# Altium PCB Breakout.PcbDoc
Units mm, origin at the board's own origin, x right, y up, seen from the top; angles counter-clockwise.
Board outline 22.86 x 22.73 mm, 2 copper layers (Top Layer, Bottom Layer), stack 1.591 mm thick; 14 components, 48 nets, 126 pads, 19 vias.
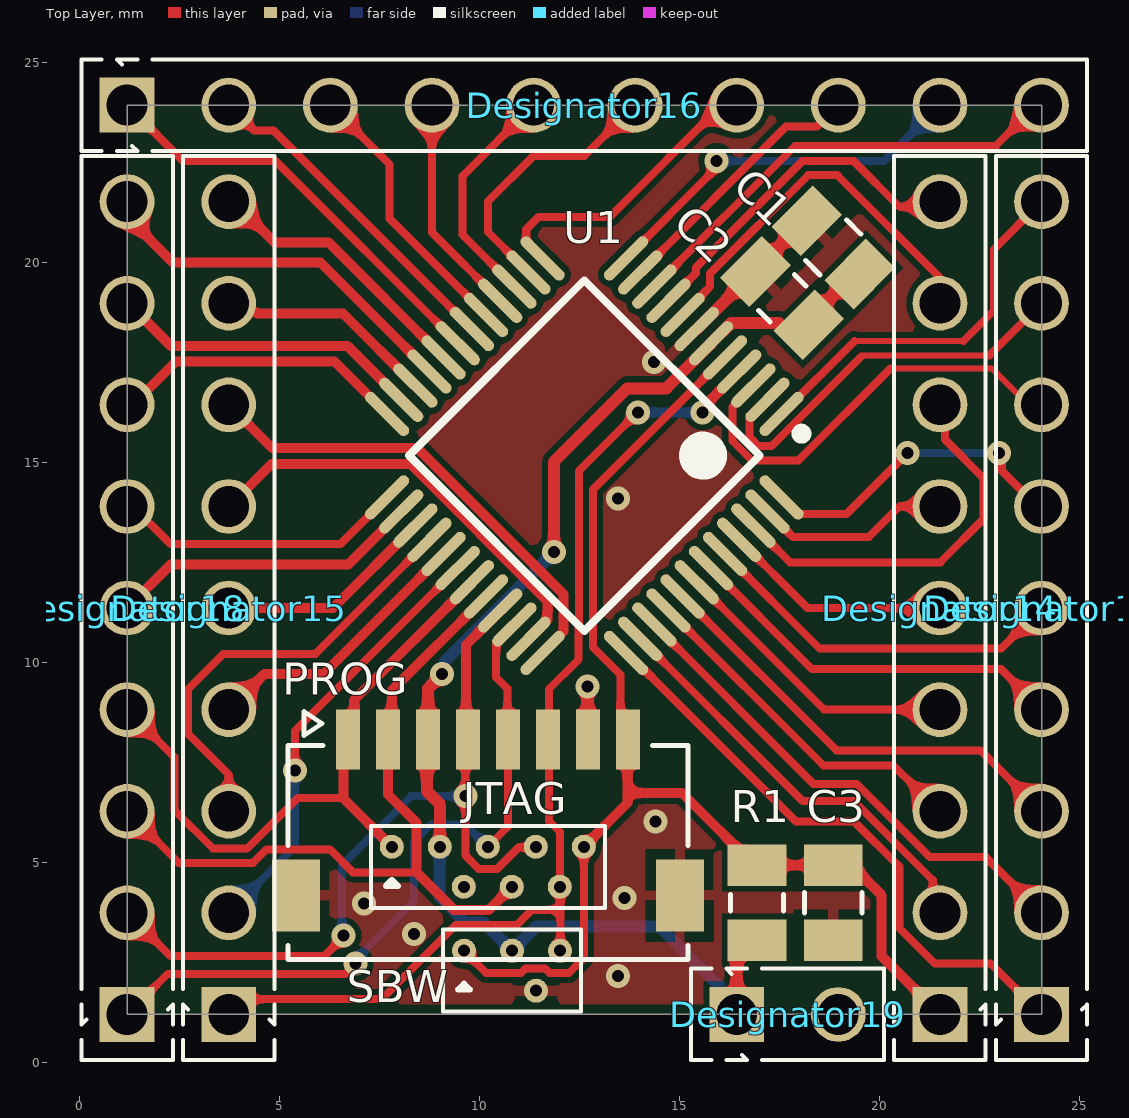
[diagram p0: Top Layer view]
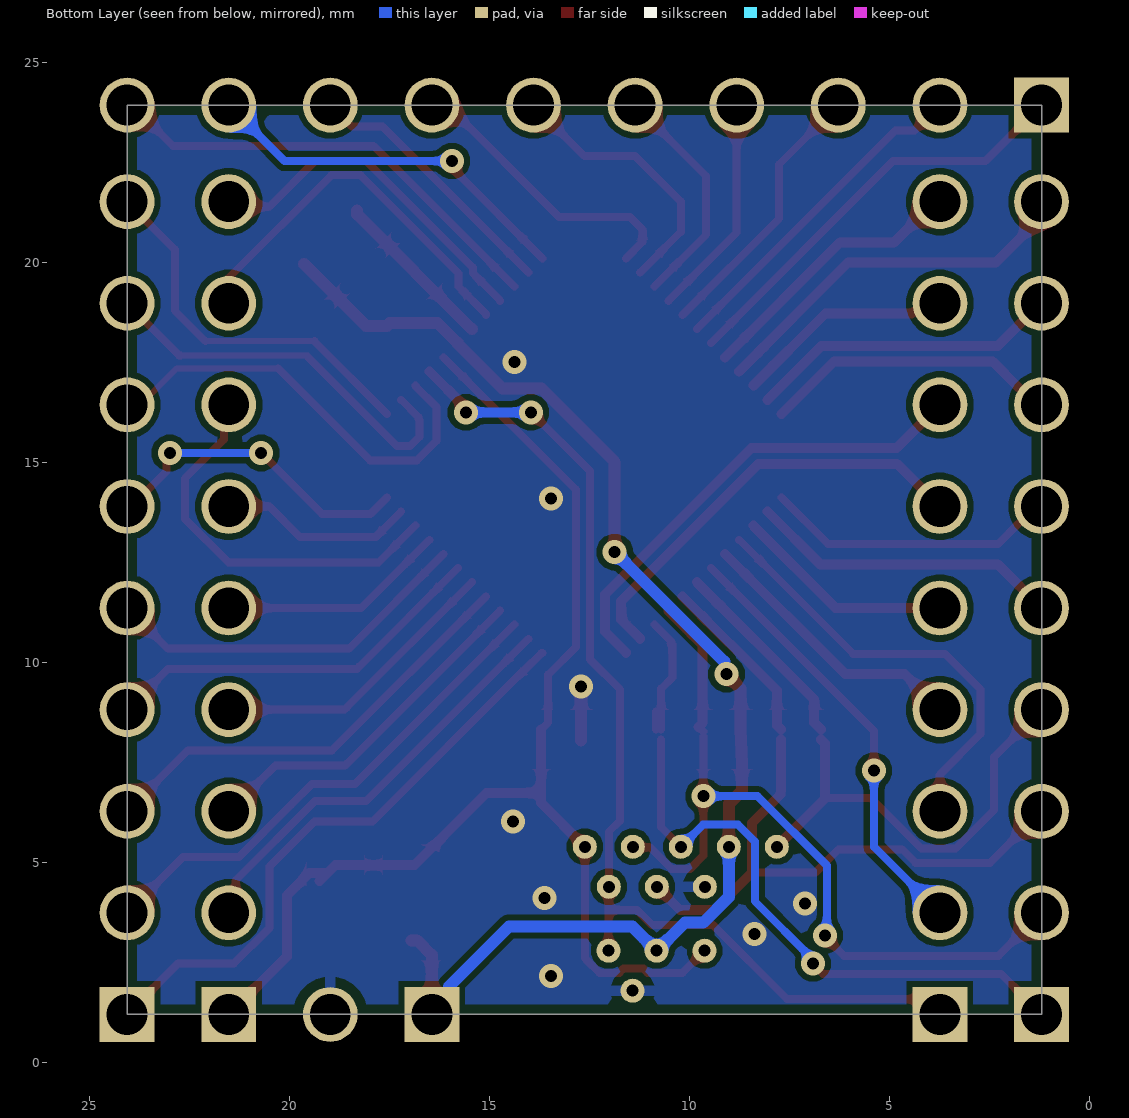
[diagram p1: Bottom Layer view, seen from below]

## Layer stack, top to bottom
Top Solder: solder mask 0.0102, Solder Resist, Dk 3.5
Top Layer: signal copper 0.0356
Dielectric 1: dielectric 1.52, FR-4, Dk 4.8
Bottom Layer: signal copper 0.0356
Bottom Solder: solder mask 0.0102, Solder Resist, Dk 3.5

## Board outline
1.193,1.202 1.193,23.935 24.053,23.935 24.053,1.202

## Design rules (kind name [scope] priority, off if disabled: settings)
BoardOutlineClearance [All] p1: gap=0.254 ignorepadtopadclearanceinfootprint=FALSE except(0: Arc-SplitContinuation Track-SplitContinuation SMDPad-SplitContinuation THPad-SplitContinuation Via-SplitContinuation Fill-SplitContinuation Poly-SplitContinuation Region-SplitContinuation)
Clearance [All] p1: gap=0.152 ignorepadtopadclearanceinfootprint=FALSE
HoleSize [All] p1: absolutevalues=TRUE maxlimit=6.2 minlimit=0.3 maxpercent=80.000 minpercent=20.000
MinimumAnnularRing [All] p1: minimumring=0.15
MinimumSolderMaskSliver [All] p1: minsoldermaskwidth=0.1
PolygonConnect ViaConnect [IsVia] p1: connectstyle=Direct reliefconductorwidth=0.254 reliefentries=4 polygonreliefangle="90 Angle" airgapwidth=0.254
PolygonConnect [All] p2: connectstyle=Relief reliefconductorwidth=0.254 reliefentries=4 polygonreliefangle="90 Angle" airgapwidth=0.254
RoutingVias [All] p1: holewidth=0.3 width=0.6 viastyle="Through Hole" minholewidth=0.3 minwidth=0.5 maxholewidth=1 maxwidth=5
SilkToSilkClearance [All] p1: silktosilkclearance=0.1
SilkToSolderMaskClearance [IsPad] p1: minsilkscreentomaskgap=0.1 clearancetoexposedcopper=TRUE
SolderMaskExpansion [All] p1: expansion=0.051 istentingtop=FALSE
SupplyNets "Schematic Supply Nets_1" [InNet('VCC')] p1: voltage=0.000
SupplyNets "Schematic Supply Nets" [InNet('GND')] p2: voltage=0.000
Width [All] p1: maxlimit=25.4 minlimit=0.15 preferedwidth=0.3
26 further rules are at their usual default settings.

## Classes and differential pairs
component class Schematic_Sheet: C1 C2 C3 PROG R1 SBW U1

## Components (designator, comment, footprint, x,y, rotation, side; value= is the part's Value field where it differs from the comment)
C1 "100nF" CAPACITOR_0805_2012M-70N 18.846,20.379 r315 top
C2 "22uF" CAPACITOR_0805_2012M-70N 17.568,19.109 r315 top
C3 "1nF" CAPACITOR_0805_2012M-70N 18.846,3.996 r90 top
Designator14 "Comment" HEADER_2.54MM_1x9PIN 21.513,11.362 r90 top
Designator15 "Comment" HEADER_2.54MM_1x9PIN 3.733,11.362 r90 top
Designator16 "Comment" HEADER_2.54MM_1x10PIN 12.623,23.935 r0 top
Designator17 "Comment" HEADER_2.54MM_1x9PIN 24.053,11.362 r90 top
Designator18 "Comment" HEADER_2.54MM_1x9PIN 1.193,11.362 r90 top
Designator19 "Comment" HEADER_2.54MM_1x2PIN 17.703,1.202 r0 top
JTAG "Headerless Pogo Holes 8-pin" POGO_8_PIN_HEADER 10.21,4.893 r0 top (schematic designator PP2)
PROG "5015680807" MOLEX_5015680807 10.21,5.528 r0 top (schematic designator J1)
R1 "47k" Resistor_0805_2012M-50N 16.941,3.996 r270 top
SBW "Headerless Pogo Holes 4-pin" POGO_4_PIN_HEADER 10.815,2.295 r0 top (schematic designator H*)
U1 "MSP430FR2355TPT" LQFP_PT_48_N 12.623,15.172 r225 top

## Footprints (in the part's own frame and the unit in brackets; to place one, negate y for a bottom-side part, rotate by r counter-clockwise, add the part's x,y. Pads: shape width x height; smd on the part's side, far side on the other; paste and mask are expansions set on the pad)
CAPACITOR_0805_2012M-70N [mm] "Capacitor, 0805 (2012 metric), 0.7mm high, nominal pads,"
  rect 1.04x1.47 smd mask+0.051: 1(-0.94,0) 2(0.94,0)
  silkscreen extent -0.25,-0.72 0.25,0.72, body extent -1,-0.73 1,0.73, height 1.23
HEADER_2.54MM_1x2PIN [mm]
  rect 1.37x1.37 hole 1.02: 1(-1.27,0)
  round 1.37 hole 1.02: 2(1.27,0)
  silkscreen extent -2.41,-1.14 2.41,1.14
HEADER_2.54MM_1x9PIN [mm]
  rect 1.37x1.37 hole 1.02: 1(-10.16,0)
  round 1.37 hole 1.02: 2(-7.62,0) 3(-5.08,0) 4(-2.54,0) 5(0,0) 6(2.54,0) 7(5.08,0) 8(7.62,0) 9(10.16,0)
  silkscreen extent -11.3,-1.14 11.3,1.14
HEADER_2.54MM_1x10PIN [mm]
  rect 1.37x1.37 hole 1.02: 1(-11.43,0)
  round 1.37 hole 1.02: 2(-8.89,0) 3(-6.35,0) 4(-3.81,0) 5(-1.27,0) 6(1.27,0) 7(3.81,0) 8(6.35,0) 9(8.89,0) 10(11.43,0)
  silkscreen extent -12.57,-1.14 12.57,1.14
LQFP_PT_48_N [mm]
  oval 1.45x0.28 smd paste+0 mask+0.051: 1(-4.225,2.75) 2(-4.225,2.25) 3(-4.225,1.75) 4(-4.225,1.25) 5(-4.225,0.75) 6(-4.225,0.25) 7(-4.225,-0.25) 8(-4.225,-0.75) 9(-4.225,-1.25) 10(-4.225,-1.75) 11(-4.225,-2.25) 12(-4.225,-2.75) 25(4.225,-2.75) 26(4.225,-2.25) 27(4.225,-1.75) 28(4.225,-1.25) 29(4.225,-0.75) 30(4.225,-0.25) 31(4.225,0.25) 32(4.225,0.75) 33(4.225,1.25) 34(4.225,1.75) 35(4.225,2.25) 36(4.225,2.75)
  oval 0.28x1.45 smd paste+0 mask+0.051: 13(-2.75,-4.225) 14(-2.25,-4.225) 15(-1.75,-4.225) 16(-1.25,-4.225) 17(-0.75,-4.225) 18(-0.25,-4.225) 19(0.25,-4.225) 20(0.75,-4.225) 21(1.25,-4.225) 22(1.75,-4.225) 23(2.25,-4.225) 24(2.75,-4.225) 37(2.75,4.225) 38(2.25,4.225) 39(1.75,4.225) 40(1.25,4.225) 41(0.75,4.225) 42(0.25,4.225) 43(-0.25,4.225) 44(-0.75,4.225) 45(-1.25,4.225) 46(-1.75,4.225) 47(-2.25,4.225) 48(-2.75,4.225)
  silkscreen extent -4.35,-3.1 3.1,3.57, body extent -4.5,-4.5 4.5,4.5, height 1.6
MOLEX_5015680807 [mm] "Header - Picoclasp 08-pin, SMT, RA, 4.75mm height"
  rect 0.6x1.5 smd mask+0.076: 1(-3.5,2.55) 2(-2.5,2.55) 3(-1.5,2.55) 4(-0.5,2.55) 5(0.5,2.55) 6(1.5,2.55) 7(2.5,2.55) 8(3.5,2.55)
  rect 1.2x1.8 smd mask+0.076: MP1(4.8,-1.35) MP2(-4.8,-1.35)
  silkscreen extent -5,-2.95 5,3.25, body extent -5,-2.95 5,2.95, height 4.71
POGO_4_PIN_HEADER [mm] "4-pin header for pogo pins"
  round 0.6 hole 0.3 mask+0.051: 1(-1.2,0.5) 2(0,0.5) 3(0.6,-0.5) 4(1.2,0.5)
  silkscreen extent -1.73,-1.02 1.72,1.03
POGO_8_PIN_HEADER [mm] "8-pin header for pogo pins"
  round 0.6 hole 0.3 mask+0.051: 1(-2.4,0.5) 2(-1.2,0.5) 3(-0.6,-0.5) 4(0,0.5) 5(0.6,-0.5) 6(1.2,0.5) 7(1.8,-0.5) 8(2.4,0.5)
  silkscreen extent -2.93,-1.02 2.93,1.03
Resistor_0805_2012M-50N [mm] "Resistor, 0805 (2012 metric), nominal pads"
  rect 1.04x1.47 smd mask+0.051: 1(-0.94,0) 2(0.94,0)
  silkscreen extent -0.2,-0.66 0.2,0.66, body extent -1,-0.63 1,0.62, height 0.5

## Part data
C1: library part "Generic Capacitor", "Generic Capacitor", Capacitance at Rated Voltage=40%, MF Part No.=C0805C104K5RAC7800, Package=0805, Rated Voltage=50V, Supplier 1 Part No.=399-C0805C104K5RAC7800CT-ND, Temp Range="-55°C ~ 125°C", Temperature Coefficient=X7R, Tolerance=±10%, Supplier 1=Digikey
C2: library part C0805C226M9PACTU, "Passive - Capacitor, X5R, 22uF Max, 6.3V, 0805 (2012 Metric), ±20%, -55°C ~ 85°C. 8.8uF @ 5V", Capacitance at Rated Voltage=30%, Package=0402, Rated Voltage=6.3V, Supplier 1 Part No.=399-C0805C226M9PAC7800CT-ND, Temp Range="-55°C ~ 85°C", Temperature Coefficient=X5R, Tolerance=±20%, APSS Standard Part="APSS Standard", MF Part No.=C0805C226M9PACTU, Supplier 1=Digikey
C3: library part "Generic Capacitor", "Generic Capacitor", Capacitance at Rated Voltage=100%, MF Part No.=399-C0805C102J5GAC7800CT-ND, Package=0805, Rated Voltage=50V, Temp Range="-55°C ~ 125°C", Temperature Coefficient=X7R, Tolerance=±5%, Supplier 1=Digikey, Supplier 1 Part No.=399-C0805C102J5GAC7800CT-ND
JTAG: "Connector - Pogo pin pads, 8-pin"
PROG: "Connector - Picoclasp  08-pin, SMT, RA", APSS Standard Part="APSS Standard", MF Part No.=5015680807, Mounting Type="Surface Mount", Orientation=Straight, Pins=8, Pitch=1mm, Supplier 1=Digikey
R1: library part "RMCF0805JT Series", "Passive - Resistor Series, 0805, 5%, 100m - 22M, E24, 0.063W, 1/16W, ±200ppm/°C, -55°C ~ 155°C, 0805 (2012 Metric)", MF Part No.=RMCF0805JT47K0, Package=0805, Power=1/8W, Rated Voltage=150V, Temp Range="-55°C ~ 155°C", Temperature Coefficient=±200ppm/°C, Tolerance=5%, Value Range="100m ~ 22M", APSS Standard Part="APSS Standard", E Series=E24, Supplier 1=Digikey
SBW: "Connector - Pogo pin pads, 4-pin"
U1: "IC - Microcontroller, LQFP-48, 24MHz, 32KB FRAM, Op-Amps/PGAs, 12-bit DACs, 12-bit ADC, -40 to 105C", Package=LQFP-48, Rated Voltage=3.6V, Supplier 1 Part No.=296-50260-ND, Temp Range="-40°C ~ 105°C", APSS Standard Part="APSS Standard", MF Part No.=MSP430FR2355TPT, Supplier 1=Digikey

## Via types
v1: diameter 0.6, hole 0.3, Top Layer to Bottom Layer, 13 vias
v2: diameter 0.6, hole 0.3, Top Layer to Bottom Layer, tented both sides, 6 vias

## Nets (pads, with @x,y where several pads share a name; then routed paths per layer and width w, separated by ;. In a path a pad name is that pad's centre, name@x,y a point inside that pad or via, vN(x,y) a via of type N, cw(c..) or ccw(c..) an arc to the next point about the centre after c; other vN are vias at no path point)
GND: C1.1 C2.1 C3.1 Designator19.2 JTAG.3 PROG.7 PROG.MP1 PROG.MP2 SBW.3 U1.7 | length 5.5
  Top Layer w0.3: v2(12.7,9.398) 12.705,9.393 12.705,8.057 PROG.7@12.71,8.052 ; U1.7 18.3,21.203 C1.1@18.3,21.298
  other v1: 13.462,2.159 13.622,4.117 14.401,6.028 13.462,14.097 14.37,17.516
  other v2: 8.369,3.216 7.112,3.981
JTAG_TEST/SBW_TCK: Designator15.1 JTAG.7 PROG.6 SBW.4 U1.4 | length 26.9
  Top Layer w0.2: Designator15.1 4.114,1.583 7.552,1.583 9.407,3.438 10.931,3.438 11.309,3.816 12.023,3.816 ; JTAG.7 12.01,5.768 11.734,6.044 11.734,9.33 12.483,10.079 12.483,10.864 12.484,10.865 12.484,14.789 13.948,16.253 v1(13.961,16.253) ; SBW.4 12.023,2.803 12.023,3.816 ; JTAG.7@12.023,4.38 12.023,3.816
  Top Layer w0.25: v1(15.581,16.253) 15.648,16.32 15.648,16.43 U1.4
  Bottom Layer w0.25: v1(13.961,16.253) v1(15.581,16.253)
P1.0: Designator17.7 U1.3 | length 10.5
  Top Layer w0.15: 20.275,17.354 22.81,17.354 23.623,16.541 Designator17.7@23.721,16.541
  Top Layer w0.2: U1.3 16.848,16.914 16.322,16.388 16.322,15.543 16.808,15.057 17.978,15.057 20.275,17.354
P1.1: Designator17.8 U1.2 | length 10
  Top Layer w0.15: 19.548,17.653 19.577,17.682 22.724,17.682
  Top Layer w0.2: U1.2 16.773,16.14 16.773,16.083 16.749,16.059 16.749,15.639 16.979,15.409 17.304,15.409 19.548,17.653 ; 22.724,17.682 22.753,17.682 Designator17.8
P1.2: Designator17.9 U1.1 | length 9.6
  Top Layer w0.15: 19.374,18.034 22.098,18.034
  Top Layer w0.2: U1.1 19.374,18.034 ; 22.098,18.034 22.86,18.796 22.86,20.329 Designator17.9
P1.3: Designator17.6 U1.48 | length 7.8
  Top Layer w0.2: U1.48 17.968,13.716 19.177,13.716 v1(20.701,15.24) ; v1(22.987,15.24) 23.064,15.163 23.064,14.787 23.699,14.152 Designator17.6@23.699,13.996
  Bottom Layer w0.2: v1(20.701,15.24) v1(22.987,15.24)
P2.0: Designator15.2 U1.30 | length 11
  Top Layer w0.2: v1(5.384,7.298) 5.384,8.287 U1.30
  Bottom Layer w0.2: Designator15.2 5.384,5.393 v1(5.384,7.298)
P2.1: Designator15.4 U1.29 | length 7
  Top Layer w0.25: Designator15.4 4.622,9.711 6.101,9.711 U1.29
P2.2: Designator15.3 U1.28 | length 11.1
  Top Layer w0.2: Designator15.3 3.733,7.202 2.717,8.218 2.717,9.33 3.606,10.219 5.902,10.219 U1.28
P2.3: Designator15.5 U1.27 | length 5.5
  Top Layer w0.25: Designator15.5 6.338,11.362 U1.27
P2.4: Designator16.8 U1.11 | length 6.7
  Top Layer w0.2: U1.11 17.668,23.399 18.437,23.399 Designator16.8
P2.5: Designator16.10 U1.10 | length 11.5
  Top Layer w0.2: U1.10 17.895,22.919 22.91,22.919 Designator16.10@23.989,23.998
P2.6: Designator14.9 U1.9 | length 8.8
  Top Layer w0.2: U1.9 14.727,19.05 15.411,19.735 15.411,19.872 18.075,22.536 18.212,22.536 18.214,22.538 19.354,22.538 20.497,21.395 Designator14.9@21.513,21.395
P2.7: Designator14.8 U1.8 | length 9.8
  Top Layer w0.2: U1.8 15.08,18.711 15.764,19.395 15.764,19.726 18.221,22.183 18.947,22.183 21.513,19.617 Designator14.8
P3.0: Designator14.6 U1.47 | length 4.9
  Top Layer w0.2: U1.47 17.837,13.14 19.735,13.14 20.497,13.902 Designator14.6
P3.1: Designator14.7 U1.46 | length 9.9
  Top Layer w0.2: U1.46 17.765,12.505 21.522,12.505 22.606,13.589 22.606,14.605 21.637,15.574 21.637,16.318 Designator14.7
P3.2: Designator14.5 U1.45 | length 5.7
  Top Layer w0.2: U1.45 18.201,11.362 Designator14.5
P3.3: Designator17.5 U1.44 | length 9.3
  Top Layer w0.2: U1.44 18.51,10.346 23.037,10.346 Designator17.5
P3.4: Designator14.2 U1.38 | length 10.7
  Top Layer w0.2: U1.38 18.077,6.536 19.356,6.536 21.335,4.557 21.335,3.92 Designator14.2
P3.5: Designator17.1 U1.37 | length 15
  Top Layer w0.2: U1.37 13.688,10.24 14.141,9.786 14.155,9.786 17.913,6.028 19.366,6.028 20.497,4.897 20.497,3.361 21.386,2.472 22.783,2.472 23.227,2.027 Designator17.1
P3.6: Designator15.7 U1.36 | length 12
  Top Layer w0.25: Designator15.7 4.813,15.362 8.444,15.362 12.106,11.7 12.106,11.021 12.105,11.02 12.105,10.773 11.58,10.248 U1.36
P3.7: Designator15.6 U1.35 | length 11
  Top Layer w0.25: Designator15.6@3.737,13.897 4.8,14.96 8.277,14.96 11.704,11.534 11.704,11.079 11.226,10.602 U1.35
P4.0: Designator18.5 U1.26 | length 7.9
  Top Layer w0.25: Designator18.5 2.277,12.446 6.715,12.446 U1.26
P4.1: Designator18.6 U1.25 | length 6.6
  Top Layer w0.2: 1.778,13.462 2.275,12.965 6.527,12.965 U1.25
P4.2: Designator18.7 U1.24 | length 6.7
  Top Layer w0.25: 1.778,16.891 2.413,17.526 6.38,17.526 U1.24
P4.3: Designator18.8 U1.23 | length 7.9
  Top Layer w0.25: Designator18.8 1.546,18.629 1.572,18.629 2.294,17.907 6.706,17.907 U1.23
P4.4: Designator16.5 U1.15 | length 5.8
  Top Layer w0.2: U1.15 9.575,20.695 9.575,22.157 Designator16.5
P4.5: Designator16.6 U1.14 | length 6.9
  Top Layer w0.2: U1.14 10.21,20.767 10.21,21.522 11.353,22.665 12.623,22.665 Designator16.6
P4.6: Designator16.7 U1.13 | length 7.4
  Top Layer w0.2: U1.13 11.166,20.518 11.166,20.827 11.48,21.141 13.258,21.141 16.052,23.935 Designator16.7
P4.7: Designator16.9 U1.12 | length 9.4
  Top Layer w0.2: U1.12 15.848,22.287 v1@15.848,22.461
  Bottom Layer w0.2: v1(15.925,22.538) 20.116,22.538 Designator16.9
P5.0: Designator17.4 U1.43 | length 9.7
  Top Layer w0.2: U1.43 18.252,9.897 18.311,9.838 23.037,9.838 Designator17.4
P5.1: Designator14.4 U1.42 | length 7.4
  Top Layer w0.2: U1.42 18.561,8.881 18.619,8.822 Designator14.4
P5.2: Designator17.3 U1.41 | length 11.2
  Top Layer w0.2: U1.41 18.928,7.806 22.529,7.806 Designator17.3
P5.3: Designator14.3 U1.40 | length 8.9
  Top Layer w0.2: U1.40 18.544,7.484 18.602,7.425 20.345,7.425 Designator14.3
P5.4: Designator17.2 U1.39 | length 12.7
  Top Layer w0.2: U1.39 18.353,6.967 19.431,6.967 19.96,6.438 21.259,5.139 22.656,5.139 Designator17.2
P6.0: Designator15.8 U1.22 | length 5.5
  Top Layer w0.25: Designator15.8 3.947,18.768 4.4,18.768 4.439,18.728 6.592,18.728 U1.22
P6.1: Designator18.9 U1.21 | length 9.5
  Top Layer w0.25: Designator18.9 1.193,21.141 2.336,19.998 6.029,19.998 U1.21
P6.2: Designator15.9 U1.20 | length 6.9
  Top Layer w0.25: Designator15.9@3.796,21.585 4.876,20.506 6.228,20.506 U1.20
P6.3: Designator16.1 U1.19 | length 10.7
  Top Layer w0.2: Designator16.1 2.59,22.538 4.903,22.538 U1.19
P6.4: Designator16.2 U1.18 | length 8.4
  Top Layer w0.2: Designator16.2 4.368,23.3 4.849,23.3 U1.18
P6.5: Designator16.3 U1.17 | length 6.9
  Top Layer w0.2: Designator16.3 7.752,22.456 7.752,21.103 U1.17
P6.6: Designator16.4 U1.16 | length 5.6
  Top Layer w0.2: Designator16.4 8.813,20.75 U1.16
Reset/SBW_TDIO: C3.2 Designator14.1 JTAG.8 PROG.8 R1.1 SBW.1 U1.5 | length 31.9
  Top Layer w0.2: SBW.1 10.167,2.243 11.044,2.243 11.149,2.347 11.644,2.347 11.749,2.243 12.244,2.243 12.567,2.566 12.567,2.569 12.61,2.611 JTAG.8 ; PROG.8@13.702,8.324 13.527,8.499 13.527,9.696 12.835,10.388 12.835,10.718 12.836,10.719 12.836,14.325 U1.5
  Top Layer w0.25: JTAG.8 13.702,6.485 13.702,6.739 ; PROG.8@13.702,8.324 13.702,6.739 ; C3.2@19.241,4.541 C3.2@19.044,4.738 ; Designator14.1 20.058,2.657 20.058,4.181 19.5,4.738 C3.2@19.044,4.738 ; 13.702,6.739 15.067,6.739 16.87,4.936 R1.1 C3.2 C3.2@19.044,4.738
UCA0_CLK/JTAG_TMS: Designator18.2 JTAG.6 PROG.4 U1.33 | length 20.1
  Top Layer w0.2: Designator18.2 2.273,2.662 6.127,2.662 6.604,3.14 v2(6.604,3.175) ; PROG.4@9.65,8.145 v2(9.65,6.658) 9.65,5.172 9.981,4.841 10.439,4.841 10.976,5.378 11.395,5.378 JTAG.6 ; PROG.4@9.65,8.272 PROG.4@9.702,8.324
  Top Layer w0.25: PROG.4@9.765,8.387 9.665,8.488 9.665,10.438 10.519,11.292 U1.33
  Bottom Layer w0.2: v2(6.604,3.175) 6.56,3.219 6.56,4.924 8.294,6.658 v2(9.65,6.658)
UCA0_RX/MISO/JTAG_TDI: Designator18.3 JTAG.5 PROG.2 U1.32 | length 19.1
  Top Layer w0.2: Designator18.3 2.483,4.992 4.339,4.992 4.677,5.33 6.266,5.33 6.843,4.754 8.433,4.754
  Top Layer w0.25: PROG.2@7.702,8.324 7.809,8.431 7.809,9.297 U1.32 ; PROG.2 7.71,6.821 7.718,6.702 8.433,5.987 8.433,4.754 9.371,3.816 10.233,3.816 JTAG.5
UCA0_STE/JTAG_TCK: Designator18.1 JTAG.4 PROG.5 U1.34 | length 18.4
  Top Layer w0.2: Designator18.1 2.209,2.218 6.654,2.218 v2(6.908,2.472) ; JTAG.4 10.71,5.893 PROG.5 ; PROG.5@10.702,8.324 10.702,9.346 10.42,9.628 10.42,10.438 10.444,10.462 10.444,10.518 U1.34 ; PROG.5@10.829,8.324 PROG.5@10.829,8.774
  Bottom Layer w0.2: v2(6.908,2.472) 6.908,2.579 8.362,4.034 8.362,5.527 8.781,5.945 9.658,5.945 JTAG.4
UCA0_TX/MOSI/JTAG_TDO: Designator18.4 JTAG.1 PROG.1 U1.31 | length 16.4
  Top Layer w0.2: Designator18.4 2.381,7.634 2.381,6.309 3.345,5.345 4.193,5.345 5.46,6.612 6.604,6.612
  Top Layer w0.25: 6.591,6.612 JTAG.1 ; 6.604,6.612 6.604,7.972 PROG.1 ; PROG.1@6.702,8.324 6.877,8.499 6.877,9.072 U1.31
VCC: C1.2 C2.2 Designator19.1 JTAG.2 PROG.3 R1.2 SBW.2 U1.6 | length 32.4
  Top Layer w0.3: JTAG.2 9.01,6.352 9.002,6.471 8.686,6.787 8.686,7.478 8.716,8.338 8.716,9.348 v1@9.067,9.699 ; v1(11.863,12.761) 11.863,15.019 13.699,16.856 14.674,16.856 15.787,17.969 U1.6 16.29,18.485 17.491,18.485 17.557,18.419 18.081,18.419 C1.2@19.63,19.968 ; Designator19.1 16.433,2.686 16.803,3.056 R1.2
  Bottom Layer w0.3: JTAG.2 9.008,5.391 9.008,4.143 9.653,3.498 10.112,3.498 SBW.2 11.417,3.397 14.51,3.397 16.002,1.905 ; 9.124,10.022 v1(11.863,12.761)
  other v1: 9.067,9.711

## Polygon pours and split planes (outlines as drawn)
GND on Bottom Layer "GND_BOTTOM" (solid, remove dead copper, pour order 0): 1.193,23.935 24.053,23.935 24.053,1.202 1.193,1.202
GND on Top Layer "GND_TOP" (solid, remove dead copper, pour order 1): 1.193,23.935 21.658,23.935 24.053,23.935 24.053,1.202 1.193,1.202

## Silkscreen, mask and mechanical layers (free items; w line width, h text height)
Board Outline:
  the board outline again, w0.1